# EAGLE board iceberg20 (EAGLE 9.5.0)

Size 160 x 100 mm. Coordinates in mm from the lower left corner, seen from the top.
Outline: 0,0 160,0 160,100 0,100 0,0
Copper layers (1*16): Top 0.035mm / dielectric 1.5mm / Bottom 0.035mm
Design rules "default": minimum track width 6mil, minimum drill 0.35mm, track to track 6mil, track to pad 6mil, pad to pad 6mil, via to via 6mil, smd to smd 6mil, copper to edge 40mil, drill to drill 6mil, minimum pad ring 10mil, minimum via ring 8mil, stop-mask expansion 4mil, vias tented up to drill 0mil, thermal gap 10mil
Net classes: 1 signal: width 0.254 mm; 3 4A: width 1.016 mm; 4 6A: width 2.032 mm

## Footprints (pad centres in the part's own frame; a part is rotated, then mirrored left to right if it is on the bottom)
C0805 = smd 1.172 x 1.565: 1 -1.072,0; 2 1.072,0
DPAK = smd 2.702 x 1.023: 1 -4.253,1.14; 2 -4.253,-1.14 | smd 6.083 x 5.529: 3 2.562,0
CAPACITOR-THT-4 = drill 0.6: 1 -0.75,0; 2 0.75,0
CON-01X02 = drill 1.016 pad 1.88: 1 1.22,2.5; 2 3.76,2.5
CON-01X04 = drill 1.1: 1 1.22,3.17; 2 3.76,3.17; 3 6.3,3.17; 4 8.84,3.17
SO8 = smd 0.6 x 2.2: 1 -1.905,-2.6; 2 -0.635,-2.6; 3 0.635,-2.6; 4 1.905,-2.6; 5 1.905,2.6; 6 0.635,2.6; 7 -0.635,2.6; 8 -1.905,2.6
R0805 = smd 1.3 x 1.5: 1 -0.95,0; 2 0.95,0
2X5 = drill 0.8 square: 1 -3,3 | drill 0.8: 2 0,3; 3 -3,0; 4 0,0; 5 -3,-3; 6 0,-3; 7 -3,-6; 8 0,-6; 9 -3,-9; 10 0,-9
2X15 = drill 0.7 square: 1 -1.27,17.78 | drill 0.7: 2 1.27,17.78; 3 -1.27,15.24; 4 1.27,15.24; 5 -1.27,12.7; 6 1.27,12.7; 7 -1.27,10.16; 8 1.27,10.16; 9 -1.27,7.62; 10 1.27,7.62; 11 -1.27,5.08; 12 1.27,5.08; 13 -1.27,2.54; 14 1.27,2.54; 15 -1.27,0; 16 1.27,0; 17 -1.27,-2.54; 18 1.27,-2.54; 19 -1.27,-5.08; 20 1.27,-5.08; 21 -1.27,-7.62; 22 1.27,-7.62; 23 -1.27,-10.16; 24 1.27,-10.16; 25 -1.27,-12.7; 26 1.27,-12.7; 27 -1.27,-15.24; 28 1.27,-15.24; 29 -1.27,-17.78; 30 1.27,-17.78
ARDUINO_MEGA = drill 1.016 pad 1.88: 0 11.43,25.4; 1 8.89,25.4; 2 6.35,25.4; 3 3.81,25.4; 3.3V -16.51,-22.86; 4 1.27,25.4; 5 -1.27,25.4; 5V@0 -13.97,-22.86; 5V@1 41.91,25.4; 5V@2 44.45,25.4; 6 -3.81,25.4; 7 -6.35,25.4; 8 -10.414,25.4; 9 -12.954,25.4; 10 -15.494,25.4; 11 -18.034,25.4; 12 -20.574,25.4; 13 -23.114,25.4; 14 16.51,25.4; 15 19.05,25.4; 16 21.59,25.4; 17 24.13,25.4; 18 26.67,25.4; 19 29.21,25.4; 20 31.75,25.4; 21 34.29,25.4; A0 -1.27,-22.86; A1 1.27,-22.86; A2 3.81,-22.86; A3 6.35,-22.86; A4 8.89,-22.86; A5 11.43,-22.86; A6 13.97,-22.86; A7 16.51,-22.86; A8 21.59,-22.86; A9 24.13,-22.86; A10 26.67,-22.86; A11 29.21,-22.86; A12 31.75,-22.86; A13 34.29,-22.86; A14 36.83,-22.86; A15 39.37,-22.86; AREF -28.194,25.4; GND@0 -11.43,-22.86; GND@1 -8.89,-22.86; GND@2 41.91,-17.78; GND@3 44.45,-17.78; GND@4 -25.654,25.4; RESET -19.05,-22.86; VIN -6.35,-22.86 | drill 1.016 pad 1.88 octagon: 22 41.91,22.86; 23 44.45,22.86; 24 41.91,20.32; 25 44.45,20.32; 26 41.91,17.78; 27 44.45,17.78; 28 41.91,15.24; 29 44.45,15.24; 30 41.91,12.7; 31 44.45,12.7; 32 41.91,10.16; 33 44.45,10.16; 34 41.91,7.62; 35 44.45,7.62; 36 41.91,5.08; 37 44.45,5.08; 38 41.91,2.54; 39 44.45,2.54; 40 41.91,0; 41 44.45,0; 42 41.91,-2.54; 43 44.45,-2.54; 44 41.91,-5.08; 45 44.45,-5.08; 46 41.91,-7.62; 47 44.45,-7.62; 48 41.91,-10.16; 49 44.45,-10.16; 50 41.91,-12.7; 51 44.45,-12.7; 52 41.91,-15.24; 53 44.45,-15.24
TESTPAD_B2,54 = smd 2.54 x 2.54: TP 0,0
HC-05 = drill 1.2 square: 1 -6.35,-8.89 | drill 1.2: 2 -3.81,-8.89; 3 -1.27,-8.89; 4 1.27,-8.89; 5 3.81,-8.89; 6 6.35,-8.89
JUMPER-SJ-3 = smd 1.168 x 1.6: 1 -1.524,0; 2 0,0; 3 1.524,0
2X3 = drill 1 pad 1.88 square: 1 -1.27,2.54 | drill 1 pad 1.88: 2 1.27,2.54; 3 -1.27,0; 4 1.27,0; 5 -1.27,-2.54; 6 1.27,-2.54
PLCC-2 = smd 1.4 x 1.4: A -1.45,0; C 1.45,0
SPEAKER = drill 0.8 square: 1 0,0 | drill 0.8: 2 6.5,0
1801.2106 = drill 1.4 long: 1 0,-0.076; 2 0,7.5
TEENSY-3 = drill 1.1: 0 7.62,-13.97; 1 7.62,-11.43; 2 7.62,-8.89; 3 7.62,-6.35; 3.3V 2.54,16.51; 3V -7.62,-11.43; 4 7.62,-3.81; 5 7.62,-1.27; 6 7.62,1.27; 7 7.62,3.81; 8 7.62,6.35; 9 7.62,8.89; 10 7.62,11.43; 11 7.62,13.97; 12 7.62,16.51; 13 -7.62,16.51; 14 -7.62,13.97; 15 -7.62,11.43; 16 -7.62,8.89; 17 -7.62,6.35; 18 -7.62,3.81; 19 -7.62,1.27; 20 -7.62,-1.27; 21 -7.62,-3.81; 22 -7.62,-6.35; 23 -7.62,-8.89; A10 -5.08,-6.35; A11 -5.08,-3.81; A14/DAC -5.08,16.51; AGND -7.62,-13.97; AREF -5.08,-8.89; GND 0,16.51; GND1 7.62,-16.51; PROG -2.54,16.51; VBAT 5.08,16.51; VIN -7.62,-16.51; VUSB -5.08,-13.97
SH22,5 = drill 1.321 pad 2.54 long: 1 -11.252,0; 2 11.252,0
1206 = smd 1.4 x 1.5: A -1.5,0; C 1.5,0
TSOP312 = drill 1 square: 1 -3.81,0 | drill 1: 2 -1.27,0; 3 3.81,0
USOP-8 = smd 1.725 x 0.507: 1 -2.215,0.975; 2 -2.215,0.325; 3 -2.215,-0.325; 4 -2.215,-0.975; 5 2.215,-0.975; 6 2.215,-0.325; 7 2.215,0.325; 8 2.215,0.975
LED-3MM = drill 0.84 pad 1.44 square: 1 -1.27,0 | drill 0.84 pad 1.44: 2 1.27,0
SOT23 = smd 1.38 x 0.679: 1 -1.216,-0.95; 2 -1.216,0.95; 3 1.216,0
CAPACITOR-THT-13 = drill 0.85 pad 1.55: 1 -2.54,0; 2 2.54,0
DO-214BA = smd 2.716 x 1.709: 1 -2.316,0; 2 2.316,0
TO220V = drill 1.016 long: 1 -2.54,-2.54; 2 0,-2.54; 3 2.54,-2.54
CAPACITOR-THT-6.3 = drill 0.75 pad 1.45: 1 -1.25,0; 2 1.25,0
DIL20 = drill 0.813 long: 1 -11.43,-3.81; 2 -8.89,-3.81; 3 -6.35,-3.81; 4 -3.81,-3.81; 5 -1.27,-3.81; 6 1.27,-3.81; 7 3.81,-3.81; 8 6.35,-3.81; 9 8.89,-3.81; 10 11.43,-3.81; 11 11.43,3.81; 12 8.89,3.81; 13 6.35,3.81; 14 3.81,3.81; 15 1.27,3.81; 16 -1.27,3.81; 17 -3.81,3.81; 18 -6.35,3.81; 19 -8.89,3.81; 20 -11.43,3.81
SOIC-8 = smd 1.212 x 0.599: 1 -2.8,1.905; 2 -2.8,0.635; 3 -2.8,-0.635; 4 -2.8,-1.905; 5 2.8,-1.905; 6 2.8,-0.635; 7 2.8,0.635; 8 2.8,1.905
TO252 = smd 2.914 x 1.004: 1 -4.346,2.29; 2 -4.346,-2.29 | smd 6.457 x 4.782: 3 2.574,0
LIB_WECO121 = drill 1.4: P1 5.08,0 | drill 1.4 square: P2 0,0
XH-4 = drill 1 square: P$1 -3.75,0 | drill 1: P$2 -1.25,0; P$3 1.25,0; P$4 3.75,0
TO-92 = drill 0.813 octagon: 1 1.27,0; 2 0,1.905; 3 -1.27,0
CMPS12 = drill 1.2 square: 1 -6.35,-10.16 | drill 1.2: 2 -3.81,-10.16; 3 -1.27,-10.16; 4 1.27,-10.16; 5 3.81,-10.16; 6 6.35,-10.16
RTC = drill 1.1: + 5.08,0; - -5.08,0; C 0,0; D 2.54,0; NC -2.54,0
SRF-08 = drill 1 square: 1 -5.08,-2.54 | drill 1: 2 -2.54,-2.54; 3 0,-2.54; 4 2.54,-2.54; 5 5.08,-2.54
SJ = smd 1.168 x 1.6: 1 -0.762,0; 2 0.762,0

## Placement (x,y rotation side)
5V-LINEARWANDLER1:C1  100n  [C0805]  not placed on the board
5V-LINEARWANDLER1:C2  330n  [C0805]  not placed on the board
5V-LINEARWANDLER1:IC1  L7805CV  [DPAK]  not placed on the board
5V-LINEARWANDLER2:C1  100n  [C0805]  not placed on the board
5V-LINEARWANDLER2:C2  330n  [C0805]  not placed on the board
5V-LINEARWANDLER2:IC1  L7805CV  [DPAK]  not placed on the board
5V-LINEARWANDLER4:C1  100n  [C0805]  not placed on the board
5V-LINEARWANDLER4:C2  330n  [C0805]  not placed on the board
5V-LINEARWANDLER4:IC1  L7805CV  [DPAK]  not placed on the board
ANSCHLUESSE1:C1  100n  [C0805]  not placed on the board
ANSCHLUESSE1:C2  1 uF, 50 V, ±20 %  [CAPACITOR-THT-4]  not placed on the board
ANSCHLUESSE1:X1  PS25/2GPS25/2GWS-1X02  [CON-01X02]  not placed on the board
ANSCHLUESSE1:X2  PS25/2GPS25/2GWS-1X02  [CON-01X02]  not placed on the board
ANSCHLUESSE1:X3  PS25/2GPS25/2GWS-1X02  [CON-01X02]  not placed on the board
ANSCHLUESSE1:X4  PS25/2GPS25/2GWS-1X02  [CON-01X02]  not placed on the board
ANSCHLUESSE1:X5  PS25/4G  [CON-01X04]  not placed on the board
ANSCHLUESSE-UNTEN1:IC1  P82B96  [SO8]  not placed on the board
ANSCHLUESSE-UNTEN1:R1  10k  [R0805]  not placed on the board
ANSCHLUESSE-UNTEN1:R2  10k  [R0805]  not placed on the board
ANSCHLUESSE-UNTEN1:X1  BUCHSENLEISTE-10  [2X5]  not placed on the board
ANSCHLUESSE-UNTEN1:X2  WANNENSTECKER-30  [2X15]  not placed on the board
ARDUINO1:IC1  ARUINO-MEGA  [ARDUINO_MEGA]  not placed on the board
ARDUINO1:R1  1k  [R0805]  not placed on the board
ARDUINO1:R2  1k  [R0805]  not placed on the board
ARDUINO1:R3  100k  [R0805]  not placed on the board
ARDUINO1:R4  100k  [R0805]  not placed on the board
ARDUINO1:TP1  TESTPAD  [TESTPAD_B2,54]  not placed on the board
ARDUINO1:TP2  TESTPAD  [TESTPAD_B2,54]  not placed on the board
BLUETOOTH1:C1  100n  [C0805]  not placed on the board
BLUETOOTH1:IC1  HC-05  [HC-05]  not placed on the board
CAMERA1:C1  1 uF, 50 V, ±20 %  [CAPACITOR-THT-4]  not placed on the board
CAMERA1:J1  JUMPER  [JUMPER-SJ-3]  not placed on the board
CAMERA1:X1  WANNENSTECKER-6  [2X3]  not placed on the board
CAMERA1:X2  WANNENSTECKER-6  [2X3]  not placed on the board
CAMERA1:X3  PS25/2GPS25/2GWS-1X02  [CON-01X02]  not placed on the board
EIN/AUSGABE1:LED1  GREEN  [PLCC-2]  not placed on the board
EIN/AUSGABE1:LED2  GREEN  [PLCC-2]  not placed on the board
EIN/AUSGABE1:LED3  LED-WHITE  [PLCC-2]  not placed on the board
EIN/AUSGABE1:LED4  LED-WHITE  [PLCC-2]  not placed on the board
EIN/AUSGABE1:LED5  LED-WHITE  [PLCC-2]  not placed on the board
EIN/AUSGABE1:M1  SPEAKER  [SPEAKER]  not placed on the board
EIN/AUSGABE1:R1  100R  [R0805]  not placed on the board
EIN/AUSGABE1:R2  100R  [R0805]  not placed on the board
EIN/AUSGABE1:R3  120R  [R0805]  not placed on the board
EIN/AUSGABE1:R4  120R  [R0805]  not placed on the board
EIN/AUSGABE1:R5  120R  [R0805]  not placed on the board
EIN/AUSGABE1:S1  SWITCH  [1801.2106]  not placed on the board
ENC1:IC1  TEENSY-3.2  [TEENSY-3]  not placed on the board
ENC1:LED1  LED-WHITE  [PLCC-2]  not placed on the board
ENC1:LED2  LED-WHITE  [PLCC-2]  not placed on the board
ENC1:LED3  LED-WHITE  [PLCC-2]  not placed on the board
ENC1:LED4  LED-WHITE  [PLCC-2]  not placed on the board
ENC1:R1  120R  [R0805]  not placed on the board
ENC1:R2  120R  [R0805]  not placed on the board
ENC1:R3  120R  [R0805]  not placed on the board
ENC1:R4  120R  [R0805]  not placed on the board
F1:F1  [SH22,5]  not placed on the board
F1:LED1  LED-GREEN1  [1206]  not placed on the board
F1:LED2  LED-GREEN1  [1206]  not placed on the board
F1:R1  270R  [R0805]  not placed on the board
F2:F1  [SH22,5]  not placed on the board
F2:LED1  LED-GREEN1  [1206]  not placed on the board
F2:LED2  LED-GREEN1  [1206]  not placed on the board
F2:R1  270R  [R0805]  not placed on the board
F3:F1  [SH22,5]  not placed on the board
F3:LED1  LED-GREEN1  [1206]  not placed on the board
F3:LED2  LED-GREEN1  [1206]  not placed on the board
F3:R1  270R  [R0805]  not placed on the board
F4:F1  [SH22,5]  not placed on the board
F4:LED1  LED-GREEN1  [1206]  not placed on the board
F4:LED2  LED-GREEN1  [1206]  not placed on the board
F4:R1  270R  [R0805]  not placed on the board
F5:F1  [SH22,5]  not placed on the board
F5:LED1  LED-GREEN1  [1206]  not placed on the board
F5:LED2  LED-GREEN1  [1206]  not placed on the board
F5:R1  270R  [R0805]  not placed on the board
F6:F1  [SH22,5]  not placed on the board
F6:LED1  LED-GREEN1  [1206]  not placed on the board
F6:LED2  LED-GREEN1  [1206]  not placed on the board
F6:R1  270R  [R0805]  not placed on the board
IR-EMPFAENGER1:C1  100n  [C0805]  not placed on the board
IR-EMPFAENGER1:C2  100n  [C0805]  not placed on the board
IR-EMPFAENGER1:C3  100n  [C0805]  not placed on the board
IR-EMPFAENGER1:C4  100n  [C0805]  not placed on the board
IR-EMPFAENGER1:C5  100n  [C0805]  not placed on the board
IR-EMPFAENGER1:C6  100n  [C0805]  not placed on the board
IR-EMPFAENGER1:IC1  TSOP31433  [TSOP312]  not placed on the board
IR-EMPFAENGER1:IC2  TSOP31433  [TSOP312]  not placed on the board
IR-EMPFAENGER1:IC3  TSOP31433  [TSOP312]  not placed on the board
IR-EMPFAENGER1:IC4  TSOP31433  [TSOP312]  not placed on the board
IR-EMPFAENGER1:IC5  TSOP31433  [TSOP312]  not placed on the board
IR-EMPFAENGER1:IC6  TSOP31433  [TSOP312]  not placed on the board
IR_SENDER1:C1  100n  [C0805]  not placed on the board
IR_SENDER1:IC1  DS1099  [USOP-8]  not placed on the board
IR_SENDER1:LED1  IR-LED  [LED-3MM]  not placed on the board
IR_SENDER1:LED2  IR-LED  [LED-3MM]  not placed on the board
IR_SENDER1:LED3  IR-LED  [LED-3MM]  not placed on the board
IR_SENDER1:LED4  IR-LED  [LED-3MM]  not placed on the board
IR_SENDER1:LED5  IR-LED  [LED-3MM]  not placed on the board
IR_SENDER1:LED6  IR-LED  [LED-3MM]  not placed on the board
IR_SENDER1:LED7  IR-LED  [LED-3MM]  not placed on the board
IR_SENDER1:LED8  IR-LED  [LED-3MM]  not placed on the board
IR_SENDER1:LED9  IR-LED  [LED-3MM]  not placed on the board
IR_SENDER1:LED10  IR-LED  [LED-3MM]  not placed on the board
IR_SENDER1:LED11  IR-LED  [LED-3MM]  not placed on the board
IR_SENDER1:LED12  IR-LED  [LED-3MM]  not placed on the board
IR_SENDER1:LED13  IR-LED  [LED-3MM]  not placed on the board
IR_SENDER1:LED14  IR-LED  [LED-3MM]  not placed on the board
IR_SENDER1:R1  100k  [R0805]  not placed on the board
IR_SENDER1:R2  100k  [R0805]  not placed on the board
IR_SENDER1:R3  100R  [R0805]  not placed on the board
IR_SENDER1:R4  100k  [R0805]  not placed on the board
IR_SENDER1:R5  100R  [R0805]  not placed on the board
IR_SENDER1:R6  100k  [R0805]  not placed on the board
IR_SENDER1:R7  15R  [R0805]  not placed on the board
IR_SENDER1:R8  15R  [R0805]  not placed on the board
IR_SENDER1:T1  KMA3D6N20SA  [SOT23]  not placed on the board
IR_SENDER1:T2  KMA3D6N20SA  [SOT23]  not placed on the board
K1:C1  2,2 mF, 16 V, ±20 %  [CAPACITOR-THT-13]  not placed on the board
K1:D1  DIODE  [DO-214BA]  not placed on the board
K1:R1  300R  [R0805]  not placed on the board
K1:R2  100k  [R0805]  not placed on the board
K1:T1  IRF1405  [TO220V]  not placed on the board
M0:+  TESTPAD  [TESTPAD_B2,54]  not placed on the board
M0:-  TESTPAD  [TESTPAD_B2,54]  not placed on the board
M0:C1  10nF  [C0805]  not placed on the board
M0:C2  220nF  [C0805]  not placed on the board
M0:C3  100nF  [C0805]  not placed on the board
M0:C4  100uF, 16V, ±20 %  [CAPACITOR-THT-6.3]  not placed on the board
M0:C5  1nF  [C0805]  not placed on the board
M0:C6  100nF  [C0805]  not placed on the board
M0:D1  DIODE  [DO-214BA]  not placed on the board
M0:D2  DIODE  [DO-214BA]  not placed on the board
M0:EN  TESTPAD  [TESTPAD_B2,54]  not placed on the board
M0:I  TESTPAD  [TESTPAD_B2,54]  not placed on the board
M0:IC1  L6205N  [DIL20]  not placed on the board
M0:IC2  ACS712ACS712-SOIC-8  [SOIC-8]  not placed on the board
M0:IN1  TESTPAD  [TESTPAD_B2,54]  not placed on the board
M0:IN2  TESTPAD  [TESTPAD_B2,54]  not placed on the board
M0:R1  100R  [R0805]  not placed on the board
M0:R2  100k  [R0805]  not placed on the board
M0:R3  10k  [R0805]  not placed on the board
M0:VS  TESTPAD  [TESTPAD_B2,54]  not placed on the board
M1:+  TESTPAD  [TESTPAD_B2,54]  not placed on the board
M1:-  TESTPAD  [TESTPAD_B2,54]  not placed on the board
M1:C1  10nF  [C0805]  not placed on the board
M1:C2  220nF  [C0805]  not placed on the board
M1:C3  100nF  [C0805]  not placed on the board
M1:C4  100uF, 16V, ±20 %  [CAPACITOR-THT-6.3]  not placed on the board
M1:C5  1nF  [C0805]  not placed on the board
M1:C6  100nF  [C0805]  not placed on the board
M1:D1  DIODE  [DO-214BA]  not placed on the board
M1:D2  DIODE  [DO-214BA]  not placed on the board
M1:EN  TESTPAD  [TESTPAD_B2,54]  not placed on the board
M1:I  TESTPAD  [TESTPAD_B2,54]  not placed on the board
M1:IC1  L6205N  [DIL20]  not placed on the board
M1:IC2  ACS712ACS712-SOIC-8  [SOIC-8]  not placed on the board
M1:IN1  TESTPAD  [TESTPAD_B2,54]  not placed on the board
M1:IN2  TESTPAD  [TESTPAD_B2,54]  not placed on the board
M1:R1  100R  [R0805]  not placed on the board
M1:R2  100k  [R0805]  not placed on the board
M1:R3  10k  [R0805]  not placed on the board
M1:VS  TESTPAD  [TESTPAD_B2,54]  not placed on the board
M2:+  TESTPAD  [TESTPAD_B2,54]  not placed on the board
M2:-  TESTPAD  [TESTPAD_B2,54]  not placed on the board
M2:C1  10nF  [C0805]  not placed on the board
M2:C2  220nF  [C0805]  not placed on the board
M2:C3  100nF  [C0805]  not placed on the board
M2:C4  100uF, 16V, ±20 %  [CAPACITOR-THT-6.3]  not placed on the board
M2:C5  1nF  [C0805]  not placed on the board
M2:C6  100nF  [C0805]  not placed on the board
M2:D1  DIODE  [DO-214BA]  not placed on the board
M2:D2  DIODE  [DO-214BA]  not placed on the board
M2:EN  TESTPAD  [TESTPAD_B2,54]  not placed on the board
M2:I  TESTPAD  [TESTPAD_B2,54]  not placed on the board
M2:IC1  L6205N  [DIL20]  not placed on the board
M2:IC2  ACS712ACS712-SOIC-8  [SOIC-8]  not placed on the board
M2:IN1  TESTPAD  [TESTPAD_B2,54]  not placed on the board
M2:IN2  TESTPAD  [TESTPAD_B2,54]  not placed on the board
M2:R1  100R  [R0805]  not placed on the board
M2:R2  100k  [R0805]  not placed on the board
M2:R3  10k  [R0805]  not placed on the board
M2:VS  TESTPAD  [TESTPAD_B2,54]  not placed on the board
M3:+  TESTPAD  [TESTPAD_B2,54]  not placed on the board
M3:-  TESTPAD  [TESTPAD_B2,54]  not placed on the board
M3:C1  10nF  [C0805]  not placed on the board
M3:C2  220nF  [C0805]  not placed on the board
M3:C3  100nF  [C0805]  not placed on the board
M3:C4  100uF, 16V, ±20 %  [CAPACITOR-THT-6.3]  not placed on the board
M3:C5  1nF  [C0805]  not placed on the board
M3:C6  100nF  [C0805]  not placed on the board
M3:D1  DIODE  [DO-214BA]  not placed on the board
M3:D2  DIODE  [DO-214BA]  not placed on the board
M3:EN  TESTPAD  [TESTPAD_B2,54]  not placed on the board
M3:I  TESTPAD  [TESTPAD_B2,54]  not placed on the board
M3:IC1  L6205N  [DIL20]  not placed on the board
M3:IC2  ACS712ACS712-SOIC-8  [SOIC-8]  not placed on the board
M3:IN1  TESTPAD  [TESTPAD_B2,54]  not placed on the board
M3:IN2  TESTPAD  [TESTPAD_B2,54]  not placed on the board
M3:R1  100R  [R0805]  not placed on the board
M3:R2  100k  [R0805]  not placed on the board
M3:R3  10k  [R0805]  not placed on the board
M3:VS  TESTPAD  [TESTPAD_B2,54]  not placed on the board
P1:R1  100k  [R0805]  not placed on the board
P1:S1  SWITCH  [1801.2106]  not placed on the board
P1:T1  AOD403  [TO252]  not placed on the board
P1:X1  TERMINAL-2  [LIB_WECO121]  not placed on the board
PUI1:X3  JST-XH-4  [XH-4]  not placed on the board
PUI1:X4  WANNENSTECKER-6  [2X3]  not placed on the board
SENSOREN1:C1  100n  [C0805]  not placed on the board
SENSOREN1:C2  100n  [C0805]  not placed on the board
SENSOREN1:C3  100n  [C0805]  not placed on the board
SENSOREN1:C4  100n  [C0805]  not placed on the board
SENSOREN1:C5  100n  [C0805]  not placed on the board
SENSOREN1:C6  100n  [C0805]  not placed on the board
SENSOREN1:C7  100n  [C0805]  not placed on the board
SENSOREN1:C8  100n  [C0805]  not placed on the board
SENSOREN1:IC1  LM-35  [TO-92]  not placed on the board
SENSOREN1:IC2  CMPS12  [CMPS12]  not placed on the board
SENSOREN1:IC3  RTC  [RTC]  not placed on the board
SENSOREN1:IC4  SRF-08  [SRF-08]  not placed on the board
SENSOREN1:IC5  SRF-08  [SRF-08]  not placed on the board
SENSOREN1:IC6  SRF-08  [SRF-08]  not placed on the board
SENSOREN1:IC7  SRF-08  [SRF-08]  not placed on the board
SENSOREN1:IC8  SRF-08  [SRF-08]  not placed on the board
SENSOREN1:J1  JUMPER-2  [SJ]  not placed on the board
SENSOREN1:R1  20k  [R0805]  not placed on the board
SENSOREN1:R2  470  [R0805]  not placed on the board
SENSOREN1:T1  SFH320  [PLCC-2]  not placed on the board
SENSOREN1:X1  PS25/2GPS25/2GWS-1X02  [CON-01X02]  not placed on the board
SENSOREN1:X2  PS25/2GPS25/2GWS-1X02  [CON-01X02]  not placed on the board

## Library data of the parts
5V-LINEARWANDLER1:C1 5V-LINEARWANDLER1:C2 5V-LINEARWANDLER2:C1 5V-LINEARWANDLER2:C2 5V-LINEARWANDLER4:C1 5V-LINEARWANDLER4:C2 ANSCHLUESSE1:C1 BLUETOOTH1:C1 IR-EMPFAENGER1:C1-IR-EMPFAENGER1:C6 IR_SENDER1:C1 M0:C1-M0:C3 M0:C5 M0:C6 M1:C1-M1:C3 M1:C5 M1:C6 M2:C1-M2:C3 M2:C5 M2:C6 M3:C1-M3:C3 M3:C5 M3:C6 SENSOREN1:C1-SENSOREN1:C8 = iceberg20; BESTAND: -; HERSTELLER: -; HERSTELLER-NR: -; SUPPLIER: -; SUPPLIER-NR: -; TOLERANZ: 10%; V-MAX: 20V
5V-LINEARWANDLER1:IC1 5V-LINEARWANDLER2:IC1 5V-LINEARWANDLER4:IC1 = iceberg20; BESTAND: 4
ANSCHLUESSE1:C2 CAMERA1:C1 = iceberg20; BESTAND: 10
ANSCHLUESSE1:X1-ANSCHLUESSE1:X4 CAMERA1:X3 SENSOREN1:X1 SENSOREN1:X2 = iceberg20; SUPPLIER: Reichelt; SUPPLIER-NR: PS 25/2G WS
ANSCHLUESSE1:X5 = iceberg20; BESTAND: 0; HERSTELLER: TE-Connectivity; HERSTELLER-NR: 3-641126-4; SUPPLIER: Mouser; SUPPLIER-NR: 571-3-641126-4
ANSCHLUESSE-UNTEN1:IC1 = iceberg20; BESTAND: 0; HERSTELLER: NXP; HERSTELLER-NR: P82B96TD,112; SUPPLIER: reichelt; SUPPLIER-NR: P 82B96 TD
ANSCHLUESSE-UNTEN1:R1 ANSCHLUESSE-UNTEN1:R2 ARDUINO1:R1-ARDUINO1:R4 EIN/AUSGABE1:R1-EIN/AUSGABE1:R5 ENC1:R1-ENC1:R4 F1:R1 F2:R1 F3:R1 F4:R1 F5:R1 F6:R1 IR_SENDER1:R1-IR_SENDER1:R8 K1:R1 K1:R2 M0:R1-M0:R3 M1:R1-M1:R3 M2:R1-M2:R3 M3:R1-M3:R3 P1:R1 SENSOREN1:R1 SENSOREN1:R2 = iceberg20; BESTAND: -; HERSTELLER: -; HERSTELLER-NR: -; SUPPLIER: -; SUPPLIER-NR: -; TOLERANZ: 5%
ANSCHLUESSE-UNTEN1:X1 = iceberg20; BESTAND: 0; HERSTELLER: Molex; HERSTELLER-NR: 43045-1012; SUPPLIER: Mouser; SUPPLIER-NR: 538-43045-1012
ANSCHLUESSE-UNTEN1:X2 = iceberg20; BESTAND: 0; HERSTELLER: HARTING; HERSTELLER-NR: 09 18 530 6324; SUPPLIER: reichelt; SUPPLIER-NR: HAN 530 6324
ARDUINO1:IC1 = iceberg20; BESTAND: 4; HERSTELLER: Arduino; HERSTELLER-NR: Arduino Mega 2560; SUPPLIER: Makerstore; SUPPLIER-NR: Arduino Mega 2650
ARDUINO1:TP1 ARDUINO1:TP2 M0:+ M0:- M0:EN M0:I M0:IN1 M0:IN2 M0:VS M1:+ M1:- M1:EN M1:I M1:IN1 M1:IN2 M1:VS M2:+ M2:- M2:EN M2:I M2:IN1 M2:IN2 M2:VS M3:+ M3:- M3:EN M3:I M3:IN1 M3:IN2 M3:VS = iceberg20; BESTAND: -; HERSTELLER: -; HERSTELLER-NR: -; SUPPLIER: -; SUPPLIER-NR: -
BLUETOOTH1:IC1 = iceberg20; BESTAND: ?
CAMERA1:J1 = iceberg20
CAMERA1:X1 CAMERA1:X2 PUI1:X4 = iceberg20; BESTAND: 6; HERSTELLER: Harting; HERSTELLER-NR: 09185066324; SUPPLIER: Bürklin; SUPPLIER-NR: 53F4200
EIN/AUSGABE1:LED1 EIN/AUSGABE1:LED2 = iceberg20; BESTAND: ?; HERSTELLER: Osram Opto Semi; HERSTELLER-NR: LPT675-N1P2-25-Z; SUPPLIER: Bürklin; SUPPLIER-NR: 66S9720
EIN/AUSGABE1:LED3-EIN/AUSGABE1:LED5 ENC1:LED1-ENC1:LED4 = iceberg20; BESTAND: 15; HERSTELLER: Osram Opto Semi; HERSTELLER-NR: LWT67C-T2U2-5K8L-Z; SUPPLIER: Bürklin; SUPPLIER-NR: 66S9826
EIN/AUSGABE1:M1 = iceberg20; BESTAND: ?; HERSTELLER: Digisound; HERSTELLER-NR: F/SWX06; SUPPLIER: Bürklin; SUPPLIER-NR: 38M212
EIN/AUSGABE1:S1 P1:S1 = iceberg20; BESTAND: 1; HERSTELLER: Marquardt; HERSTELLER-NR: 1801.2106; SUPPLIER: Bürklin; SUPPLIER-NR: 11G2420
ENC1:IC1 = iceberg20; BESTAND: 0; HERSTELLER: PJRC; HERSTELLER-NR: Teensy32; SUPPLIER: Reichelt; SUPPLIER-NR: TEENSY 3.2
F1:F1 F2:F1 F3:F1 F4:F1 F5:F1 F6:F1 = iceberg20; BESTAND: ?; HERSTELLER: SCHURTER; HERSTELLER-NR: 0031.8201; SUPPLIER: Bürklin; SUPPLIER-NR: 46G6020
F1:LED1 F1:LED2 F2:LED1 F2:LED2 F3:LED1 F3:LED2 F4:LED1 F4:LED2 F5:LED1 F5:LED2 F6:LED1 F6:LED2 = iceberg20; HERSTELLER: EVERLIGHT; HERSTELLER-NR: 15-21SYGC/S530-E1/TR8 Everlight; SUPPLIER: Bürklin; SUPPLIER-NR: 67S2004
IR-EMPFAENGER1:IC1-IR-EMPFAENGER1:IC6 = iceberg20; BESTAND: ?; HERSTELLER: Vishay Semiconductors; HERSTELLER-NR: TSOP31433; SUPPLIER: Mouser; SUPPLIER-NR: 78-TSOP31433
IR_SENDER1:IC1 = iceberg20; BESTAND: 0; HERSTELLER: Maxim Integrated; HERSTELLER-NR: DS1099U-FF+; SUPPLIER: Mouser; SUPPLIER-NR: 700-DS1099U-FF
IR_SENDER1:LED1-IR_SENDER1:LED14 = iceberg20; BESTAND: ?; HERSTELLER: Vishay; HERSTELLER-NR: TSAL4400; SUPPLIER: Bürklin; SUPPLIER-NR: 68S9224
IR_SENDER1:T1 IR_SENDER1:T2 = iceberg20; BESTAND: 0; HERSTELLER: Korea Electronics; HERSTELLER-NR: KMA3D6N20SA-RTK/P; SUPPLIER: Bürklin; SUPPLIER-NR: 24S8084
K1:C1 = iceberg20; BESTAND: ?; HERSTELLER: Teapo; HERSTELLER-NR: KSY228M016S1A5L25K SY2200UF/16V; SUPPLIER: Bürklin; SUPPLIER-NR: 11D5156
K1:D1 M0:D1 M0:D2 M1:D1 M1:D2 M2:D1 M2:D2 M3:D1 M3:D2 = iceberg20; BESTAND: 0; HERSTELLER: Vishay; HERSTELLER-NR: 9DRGF1A67A; SUPPLIER: Bürklin; SUPPLIER-NR: 26S9150
K1:T1 = iceberg20; BESTAND: 3; HERSTELLER: IOR; HERSTELLER-NR: IRF1405PBF; SUPPLIER: Bürklin; SUPPLIER-NR: 31S3068
M0:C4 M1:C4 M2:C4 M3:C4 = iceberg20; BESTAND: 10; HERSTELLER: Teapo; HERSTELLER-NR: KSE107M016S1ABE11K; SUPPLIER: Bürklin; SUPPLIER-NR: 11D5002
M0:IC1 M1:IC1 M2:IC1 M3:IC1 = iceberg20; BESTAND: ?; HERSTELLER: ST MICROELECTRONICS; HERSTELLER-NR: L6205N; SUPPLIER: reichelt; SUPPLIER-NR: L 6205 N
M0:IC2 M1:IC2 M2:IC2 M3:IC2 = iceberg20; BESTAND: ?; HERSTELLER: ALLEGRO; HERSTELLER-NR: ACS712ELCTR-05B-T; SUPPLIER: reichelt; SUPPLIER-NR: ACS712 ELCTR-05
P1:T1 = iceberg20; BESTAND: 0; HERSTELLER: Alpha & Omega; HERSTELLER-NR: AOD403; SUPPLIER: Reichelt; SUPPLIER-NR: AO D403
P1:X1 = iceberg20; HERSTELLER: Weco; HERSTELLER-NR: 20806102 121-M-121/02-K; SUPPLIER: Bürklin; SUPPLIER-NR: 47F1100
PUI1:X3 = iceberg20; BESTAND: 0; HERSTELLER: JST; HERSTELLER-NR: B4B-XH-A (LF)(SN); SUPPLIER: Bürklin; SUPPLIER-NR: 71F6408
SENSOREN1:IC1 = iceberg20; BESTAND: ?; HERSTELLER: MikroElektronika ODER TI; HERSTELLER-NR: MIKROE-912 ODER LM35*Z/*; SUPPLIER: Bürklin; SUPPLIER-NR: 74S4560
SENSOREN1:IC2 = iceberg20; BESTAND: ?; HERSTELLER: -; HERSTELLER-NR: -; SUPPLIER: -; SUPPLIER-NR: -
SENSOREN1:IC3 = iceberg20; BESTAND: 2; HERSTELLER: div.; HERSTELLER-NR: "DS3231 for PI" Modul; SUPPLIER: -; SUPPLIER-NR: -
SENSOREN1:IC4-SENSOREN1:IC8 = iceberg20; BESTAND: 12; HERSTELLER: Devantech; HERSTELLER-NR: SRF-08; SUPPLIER: -; SUPPLIER-NR: -
SENSOREN1:J1 = iceberg20; BESTAND: n.z.; HERSTELLE-NR: n.z.; HERSTELLER: n.z.; SUPPLIER: n.z.; SUPPLIER-NR: n.z.
SENSOREN1:T1 = iceberg20; BESTAND: 40; HERSTELLER: Osram Opto Semi; HESTELLER-NR: SFH320; SUPLLIER: Bürklin; SUPPLIER-NR: 68S3158

## Nets
5V-CAMERA: 5V-LINEARWANDLER2:C1.1 5V-LINEARWANDLER2:IC1.2 CAMERA1:J1.1 CAMERA1:X2.2 CAMERA1:X2.5
5V-PUI: 5V-LINEARWANDLER4:C1.1 5V-LINEARWANDLER4:IC1.2 PUI1:X3.P$1
12V-PUI: 5V-LINEARWANDLER4:C2.1 5V-LINEARWANDLER4:IC1.1 F3:F1.2 F3:R1.2 PUI1:X4.6
+5V: 5V-LINEARWANDLER1:C1.1 5V-LINEARWANDLER1:IC1.2 ANSCHLUESSE1:C1.1 ANSCHLUESSE1:X1.1 ANSCHLUESSE1:X5.4 ANSCHLUESSE-UNTEN1:X2.1 ANSCHLUESSE-UNTEN1:X2.5 ANSCHLUESSE-UNTEN1:X2.9 ANSCHLUESSE-UNTEN1:X2.13 BLUETOOTH1:C1.1 BLUETOOTH1:IC1.5 EIN/AUSGABE1:R1.2 ENC1:IC1.VIN IR-EMPFAENGER1:C1.1 IR-EMPFAENGER1:C2.1 IR-EMPFAENGER1:C3.1 IR-EMPFAENGER1:C4.1 IR-EMPFAENGER1:C5.1 IR-EMPFAENGER1:C6.1 IR-EMPFAENGER1:IC1.2 IR-EMPFAENGER1:IC2.2 IR-EMPFAENGER1:IC3.2 IR-EMPFAENGER1:IC4.2 IR-EMPFAENGER1:IC5.2 IR-EMPFAENGER1:IC6.2 IR_SENDER1:C1.1 IR_SENDER1:IC1.3 IR_SENDER1:R1.2 IR_SENDER1:R2.2 M0:C6.1 M0:IC2.8 M1:C6.1 M1:IC2.8 M2:C6.1 M2:IC2.8 M3:C6.1 M3:IC2.8 SENSOREN1:C1.1 SENSOREN1:C2.1 SENSOREN1:C3.1 SENSOREN1:C4.1 SENSOREN1:C5.1 SENSOREN1:C6.1 SENSOREN1:C7.1 SENSOREN1:C8.1 SENSOREN1:IC1.3 SENSOREN1:IC2.1 SENSOREN1:IC3.+ SENSOREN1:IC4.1 SENSOREN1:IC5.1 SENSOREN1:IC6.1 SENSOREN1:IC7.1 SENSOREN1:IC8.1 SENSOREN1:R1.2
+12V: F1:F1.1 F2:F1.1 F3:F1.1 F4:F1.1 F5:F1.1 F6:F1.1
A1: ANSCHLUESSE1:X3.1 ARDUINO1:IC1.A10
ANSCHLUESSE-UNTEN1:SCL-12V: ANSCHLUESSE-UNTEN1:IC1.5 ANSCHLUESSE-UNTEN1:IC1.6 ANSCHLUESSE-UNTEN1:R2.1 ANSCHLUESSE-UNTEN1:X2.26
ANSCHLUESSE-UNTEN1:SDA-12V: ANSCHLUESSE-UNTEN1:IC1.2 ANSCHLUESSE-UNTEN1:IC1.3 ANSCHLUESSE-UNTEN1:R1.1 ANSCHLUESSE-UNTEN1:X2.23
ANSCHLUSS-12V: ANSCHLUESSE-UNTEN1:IC1.8 ANSCHLUESSE-UNTEN1:R1.2 ANSCHLUESSE-UNTEN1:R2.2 ANSCHLUESSE-UNTEN1:X2.19 ANSCHLUESSE-UNTEN1:X2.27 ANSCHLUESSE-UNTEN1:X2.28 F4:F1.2 F4:R1.2
ARDUINO1:+5V: ARDUINO1:IC1.5V@0 ARDUINO1:IC1.5V@1 ARDUINO1:IC1.5V@2 ARDUINO1:R1.2 ARDUINO1:R2.2 ARDUINO1:R3.2 ARDUINO1:R4.2
ARDUINO1:N$1: ARDUINO1:IC1.A11 ARDUINO1:TP2.TP
ARDUINO1:N$2: ARDUINO1:IC1.24 ARDUINO1:TP1.TP
BR-I: ARDUINO1:IC1.A6 SENSOREN1:X1.2
BR-LED: ARDUINO1:IC1.A9 SENSOREN1:R2.2
CAMERA1:5V-CAMERA: CAMERA1:J1.2 CAMERA1:X1.2
CLK: ARDUINO1:IC1.52 CAMERA1:X1.3
CS: ARDUINO1:IC1.53 CAMERA1:X1.5
D1: ANSCHLUESSE1:X4.1 ARDUINO1:IC1.43
EIN/AUSGABE1:N$1: EIN/AUSGABE1:LED1.A EIN/AUSGABE1:R1.1
EIN/AUSGABE1:N$2: EIN/AUSGABE1:LED2.A EIN/AUSGABE1:R2.1
EIN/AUSGABE1:N$3: EIN/AUSGABE1:LED3.A EIN/AUSGABE1:R3.1
EIN/AUSGABE1:N$4: EIN/AUSGABE1:LED4.A EIN/AUSGABE1:R5.1
EIN/AUSGABE1:N$5: EIN/AUSGABE1:LED5.A EIN/AUSGABE1:R4.1
EN-B: ARDUINO1:IC1.22 BLUETOOTH1:IC1.6
ENA0: ANSCHLUESSE-UNTEN1:X2.2 ENC1:IC1.2
ENA1: ANSCHLUESSE-UNTEN1:X2.6 ENC1:IC1.4
ENA2: ANSCHLUESSE-UNTEN1:X2.10 ENC1:IC1.14
ENA3: ANSCHLUESSE-UNTEN1:X2.14 ENC1:IC1.16
ENB0: ANSCHLUESSE-UNTEN1:X2.3 ENC1:IC1.3
ENB1: ANSCHLUESSE-UNTEN1:X2.7 ENC1:IC1.5
ENB2: ANSCHLUESSE-UNTEN1:X2.11 ENC1:IC1.15
ENB3: ANSCHLUESSE-UNTEN1:X2.15 ENC1:IC1.17
ENC1:3.3V: ENC1:IC1.3.3V
ENC1:3V: ENC1:IC1.3V
ENC1:LED1: ENC1:IC1.20 ENC1:R1.2
ENC1:LED2: ENC1:IC1.21 ENC1:R2.2
ENC1:LED3: ENC1:IC1.22 ENC1:R3.2
ENC1:LED4: ENC1:IC1.23 ENC1:R4.2
ENC1:N$3: ENC1:LED1.A ENC1:R1.1
ENC1:N$4: ENC1:LED2.A ENC1:R2.1
ENC1:N$5: ENC1:LED3.A ENC1:R3.1
ENC1:N$8: ENC1:LED4.A ENC1:R4.1
ENC1:VBAT: ENC1:IC1.VBAT
ENC1:VUSB: ENC1:IC1.VUSB
ETC-12V: 5V-LINEARWANDLER1:C2.1 5V-LINEARWANDLER1:IC1.1 5V-LINEARWANDLER2:C2.1 5V-LINEARWANDLER2:IC1.1 ANSCHLUESSE1:C2.1 ANSCHLUESSE1:X2.1 CAMERA1:C1.1 CAMERA1:J1.3 CAMERA1:X3.2 F6:F1.2 F6:R1.2 IR_SENDER1:R7.2 IR_SENDER1:R8.2
F1:N$1: F1:LED1.A F1:R1.1
F1:N$165: F1:LED1.C F1:LED2.A
F2:N$1: F2:LED1.A F2:R1.1
F2:N$165: F2:LED1.C F2:LED2.A
F3:N$1: F3:LED1.A F3:R1.1
F3:N$165: F3:LED1.C F3:LED2.A
F4:N$1: F4:LED1.A F4:R1.1
F4:N$165: F4:LED1.C F4:LED2.A
F5:N$1: F5:LED1.A F5:R1.1
F5:N$165: F5:LED1.C F5:LED2.A
F6:N$1: F6:LED1.A F6:R1.1
F6:N$165: F6:LED1.C F6:LED2.A
GND: 5V-LINEARWANDLER1:C1.2 5V-LINEARWANDLER1:C2.2 5V-LINEARWANDLER1:IC1.3 5V-LINEARWANDLER2:C1.2 5V-LINEARWANDLER2:C2.2 5V-LINEARWANDLER2:IC1.3 5V-LINEARWANDLER4:C1.2 5V-LINEARWANDLER4:C2.2 5V-LINEARWANDLER4:IC1.3 ANSCHLUESSE1:C1.2 ANSCHLUESSE1:C2.2 ANSCHLUESSE1:X1.2 ANSCHLUESSE1:X2.2 ANSCHLUESSE1:X3.2 ANSCHLUESSE1:X4.2 ANSCHLUESSE1:X5.2 ANSCHLUESSE-UNTEN1:IC1.4 ANSCHLUESSE-UNTEN1:X2.4 ANSCHLUESSE-UNTEN1:X2.8 ANSCHLUESSE-UNTEN1:X2.12 ANSCHLUESSE-UNTEN1:X2.16 ANSCHLUESSE-UNTEN1:X2.17 ANSCHLUESSE-UNTEN1:X2.20 ANSCHLUESSE-UNTEN1:X2.22 ANSCHLUESSE-UNTEN1:X2.24 ANSCHLUESSE-UNTEN1:X2.25 ANSCHLUESSE-UNTEN1:X2.30 ARDUINO1:IC1.GND@0 ARDUINO1:IC1.GND@1 ARDUINO1:IC1.GND@2 ARDUINO1:IC1.GND@3 ARDUINO1:IC1.GND@4 BLUETOOTH1:C1.2 BLUETOOTH1:IC1.4 CAMERA1:C1.2 CAMERA1:X1.6 CAMERA1:X2.1 CAMERA1:X2.6 CAMERA1:X3.1 EIN/AUSGABE1:LED2.C EIN/AUSGABE1:LED3.C EIN/AUSGABE1:LED4.C EIN/AUSGABE1:LED5.C EIN/AUSGABE1:M1.2 EIN/AUSGABE1:S1.1 ENC1:IC1.AGND ENC1:IC1.GND ENC1:IC1.GND1 ENC1:LED1.C ENC1:LED2.C ENC1:LED3.C ENC1:LED4.C F1:LED2.C F2:LED2.C F3:LED2.C F4:LED2.C F5:LED2.C F6:LED2.C IR-EMPFAENGER1:C1.2 IR-EMPFAENGER1:C2.2 IR-EMPFAENGER1:C3.2 IR-EMPFAENGER1:C4.2 IR-EMPFAENGER1:C5.2 IR-EMPFAENGER1:C6.2 IR-EMPFAENGER1:IC1.1 IR-EMPFAENGER1:IC2.1 IR-EMPFAENGER1:IC3.1 IR-EMPFAENGER1:IC4.1 IR-EMPFAENGER1:IC5.1 IR-EMPFAENGER1:IC6.1 IR_SENDER1:C1.2 IR_SENDER1:IC1.4 IR_SENDER1:R4.1 IR_SENDER1:R6.1 IR_SENDER1:T1.1 IR_SENDER1:T2.1 K1:C1.2 K1:R2.1 K1:T1.3 M0:C3.2 M0:C4.2 M0:C5.2 M0:C6.2 M0:IC1.3 M0:IC1.5 M0:IC1.6 M0:IC1.8 M0:IC1.15 M0:IC1.16 M0:IC2.5 M0:R3.1 M1:C3.2 M1:C4.2 M1:C5.2 M1:C6.2 M1:IC1.3 M1:IC1.5 M1:IC1.6 M1:IC1.8 M1:IC1.15 M1:IC1.16 M1:IC2.5 M1:R3.1 M2:C3.2 M2:C4.2 M2:C5.2 M2:C6.2 M2:IC1.3 M2:IC1.5 M2:IC1.6 M2:IC1.8 M2:IC1.15 M2:IC1.16 M2:IC2.5 M2:R3.1 M3:C3.2 M3:C4.2 M3:C5.2 M3:C6.2 M3:IC1.3 M3:IC1.5 M3:IC1.6 M3:IC1.8 M3:IC1.15 M3:IC1.16 M3:IC2.5 M3:R3.1 P1:R1.1 P1:X1.P1 PUI1:X3.P$4 PUI1:X4.1 PUI1:X4.3 SENSOREN1:C1.2 SENSOREN1:C2.2 SENSOREN1:C3.2 SENSOREN1:C4.2 SENSOREN1:C5.2 SENSOREN1:C6.2 SENSOREN1:C7.2 SENSOREN1:C8.2 SENSOREN1:IC1.1 SENSOREN1:IC2.6 SENSOREN1:IC3.- SENSOREN1:IC4.5 SENSOREN1:IC5.5 SENSOREN1:IC6.5 SENSOREN1:IC7.5 SENSOREN1:IC8.5 SENSOREN1:J1.1 SENSOREN1:T1.C SENSOREN1:X2.1
HEARTBEAT: ARDUINO1:IC1.3 EIN/AUSGABE1:LED1.C EIN/AUSGABE1:R2.2
I-M0: ARDUINO1:IC1.36 M0:I.TP M0:IC2.7
I-M1: ARDUINO1:IC1.37 M1:I.TP M1:IC2.7
I-M2: M2:I.TP M2:IC2.7
I-M3: ARDUINO1:IC1.38 ARDUINO1:IC1.39 M3:I.TP M3:IC2.7
INTERRUPT: ANSCHLUESSE-UNTEN1:X2.18 ARDUINO1:IC1.2 ARDUINO1:R4.1
IR-EN1: ARDUINO1:IC1.41 IR_SENDER1:IC1.5 IR_SENDER1:R1.1
IR-EN2: ARDUINO1:IC1.42 IR_SENDER1:IC1.6 IR_SENDER1:R2.1
IR-SIG1: ARDUINO1:IC1.A0 IR-EMPFAENGER1:IC1.3
IR-SIG2: ARDUINO1:IC1.A1 IR-EMPFAENGER1:IC2.3
IR-SIG3: ARDUINO1:IC1.A2 IR-EMPFAENGER1:IC3.3
IR-SIG4: ARDUINO1:IC1.A3 IR-EMPFAENGER1:IC4.3
IR-SIG5: ARDUINO1:IC1.A4 IR-EMPFAENGER1:IC5.3
IR-SIG6: ARDUINO1:IC1.A5 IR-EMPFAENGER1:IC6.3
IR_SENDER1:N$1: IR_SENDER1:R3.2 IR_SENDER1:R4.2 IR_SENDER1:T1.2
IR_SENDER1:N$2: IR_SENDER1:IC1.1 IR_SENDER1:R5.1
IR_SENDER1:N$3: IR_SENDER1:LED1.2 IR_SENDER1:T1.3
IR_SENDER1:N$4: IR_SENDER1:LED1.1 IR_SENDER1:LED2.2
IR_SENDER1:N$5: IR_SENDER1:LED2.1 IR_SENDER1:LED3.2
IR_SENDER1:N$6: IR_SENDER1:LED3.1 IR_SENDER1:LED4.2
IR_SENDER1:N$7: IR_SENDER1:LED4.1 IR_SENDER1:LED5.2
IR_SENDER1:N$8: IR_SENDER1:LED5.1 IR_SENDER1:LED6.2
IR_SENDER1:N$9: IR_SENDER1:LED6.1 IR_SENDER1:LED7.2
IR_SENDER1:N$10: IR_SENDER1:R5.2 IR_SENDER1:R6.2 IR_SENDER1:T2.2
IR_SENDER1:N$11: IR_SENDER1:IC1.2 IR_SENDER1:R3.1
IR_SENDER1:N$12: IR_SENDER1:LED8.2 IR_SENDER1:T2.3
IR_SENDER1:N$13: IR_SENDER1:LED8.1 IR_SENDER1:LED9.2
IR_SENDER1:N$14: IR_SENDER1:LED9.1 IR_SENDER1:LED10.2
IR_SENDER1:N$15: IR_SENDER1:LED10.1 IR_SENDER1:LED11.2
IR_SENDER1:N$16: IR_SENDER1:LED11.1 IR_SENDER1:LED12.2
IR_SENDER1:N$17: IR_SENDER1:LED12.1 IR_SENDER1:LED13.2
IR_SENDER1:N$18: IR_SENDER1:LED13.1 IR_SENDER1:LED14.2
IR_SENDER1:N$19: IR_SENDER1:LED14.1 IR_SENDER1:R8.1
IR_SENDER1:N$20: IR_SENDER1:LED7.1 IR_SENDER1:R7.1
K1:N$1: K1:R1.2 K1:R2.2 K1:T1.1
KICK: F5:F1.2 F5:R1.2
KICK+: ANSCHLUESSE-UNTEN1:X1.9 K1:C1.1 K1:D1.1
KICK-: ANSCHLUESSE-UNTEN1:X1.10 K1:D1.2 K1:T1.2
KICK-EN: ARDUINO1:IC1.8 K1:R1.1
LED1: ARDUINO1:IC1.5 EIN/AUSGABE1:R3.2
LED2: ARDUINO1:IC1.6 EIN/AUSGABE1:R5.2
LED3: ARDUINO1:IC1.7 EIN/AUSGABE1:R4.2
M0:FILTER: M0:C5.1 M0:IC2.6
M0:M- [4A]: M0:IC1.13 M0:IC1.18 M0:IC2.3 M0:IC2.4
M0:N$4: M0:D1.2 M0:D2.1 M0:R1.2
M0:N$6: M0:C2.2 M0:D1.1 M0:IC1.12
M0:N$7: M0:C1.1 M0:R1.1
M0:N$8: M0:C1.2 M0:IC1.19
M0:N$9: M0:EN.TP M0:IC1.11 M0:IC1.20 M0:R2.2
M1:FILTER: M1:C5.1 M1:IC2.6
M1:M- [4A]: M1:IC1.13 M1:IC1.18 M1:IC2.3 M1:IC2.4
M1:N$4: M1:D1.2 M1:D2.1 M1:R1.2
M1:N$6: M1:C2.2 M1:D1.1 M1:IC1.12
M1:N$7: M1:C1.1 M1:R1.1
M1:N$8: M1:C1.2 M1:IC1.19
M1:N$9: M1:EN.TP M1:IC1.11 M1:IC1.20 M1:R2.2
M2:FILTER: M2:C5.1 M2:IC2.6
M2:M- [4A]: M2:IC1.13 M2:IC1.18 M2:IC2.3 M2:IC2.4
M2:N$4: M2:D1.2 M2:D2.1 M2:R1.2
M2:N$6: M2:C2.2 M2:D1.1 M2:IC1.12
M2:N$7: M2:C1.1 M2:R1.1
M2:N$8: M2:C1.2 M2:IC1.19
M2:N$9: M2:EN.TP M2:IC1.11 M2:IC1.20 M2:R2.2
M3:FILTER: M3:C5.1 M3:IC2.6
M3:M- [4A]: M3:IC1.13 M3:IC1.18 M3:IC2.3 M3:IC2.4
M3:N$4: M3:D1.2 M3:D2.1 M3:R1.2
M3:N$6: M3:C2.2 M3:D1.1 M3:IC1.12
M3:N$7: M3:C1.1 M3:R1.1
M3:N$8: M3:C1.2 M3:IC1.19
M3:N$9: M3:EN.TP M3:IC1.11 M3:IC1.20 M3:R2.2
M-DIR-A0: ARDUINO1:IC1.28 M0:IC1.1 M0:IC1.9 M0:IN1.TP
M-DIR-A1: ARDUINO1:IC1.30 M1:IC1.1 M1:IC1.9 M1:IN1.TP
M-DIR-A2: ARDUINO1:IC1.32 M2:IC1.1 M2:IC1.9 M2:IN1.TP
M-DIR-A3: ARDUINO1:IC1.34 M3:IC1.1 M3:IC1.9 M3:IN1.TP
M-DIR-B0: ARDUINO1:IC1.29 M0:IC1.2 M0:IC1.10 M0:IN2.TP
M-DIR-B1: ARDUINO1:IC1.31 M1:IC1.2 M1:IC1.10 M1:IN2.TP
M-DIR-B2: ARDUINO1:IC1.33 M2:IC1.2 M2:IC1.10 M2:IN2.TP
M-DIR-B3: ARDUINO1:IC1.35 M3:IC1.2 M3:IC1.10 M3:IN2.TP
M-EN0: ARDUINO1:IC1.10 M0:R2.1 M0:R3.2
M-EN1: ARDUINO1:IC1.11 M1:R2.1 M1:R3.2
M-EN2: ARDUINO1:IC1.12 M2:R2.1 M2:R3.2
M-EN3: ARDUINO1:IC1.13 M3:R2.1 M3:R3.2
MA0: ANSCHLUESSE-UNTEN1:X1.1 M0:-.TP M0:IC2.1 M0:IC2.2
MA1: ANSCHLUESSE-UNTEN1:X1.3 M1:-.TP M1:IC2.1 M1:IC2.2
MA2: ANSCHLUESSE-UNTEN1:X1.5 M2:-.TP M2:IC2.1 M2:IC2.2
MA3: ANSCHLUESSE-UNTEN1:X1.7 ANSCHLUESSE-UNTEN1:X1.8 M3:-.TP M3:IC2.1 M3:IC2.2
MB0: ANSCHLUESSE-UNTEN1:X1.2 M0:+.TP M0:IC1.4 M0:IC1.7
MB1: ANSCHLUESSE-UNTEN1:X1.4 M1:+.TP M1:IC1.4 M1:IC1.7
MB2: ANSCHLUESSE-UNTEN1:X1.6 M2:+.TP M2:IC1.4 M2:IC1.7
MB3: M3:+.TP M3:IC1.4 M3:IC1.7
MISO: ARDUINO1:IC1.50 CAMERA1:X1.1
MOSI: ARDUINO1:IC1.51 CAMERA1:X1.4
MOTOR-12V: F1:F1.2 F1:R1.2 M0:C2.1 M0:C3.1 M0:C4.1 M0:D2.2 M0:IC1.14 M0:IC1.17 M0:VS.TP M1:C2.1 M1:C3.1 M1:C4.1 M1:D2.2 M1:IC1.14 M1:IC1.17 M1:VS.TP M2:C2.1 M2:C3.1 M2:C4.1 M2:D2.2 M2:IC1.14 M2:IC1.17 M2:VS.TP M3:C2.1 M3:C3.1 M3:C4.1 M3:D2.2 M3:IC1.14 M3:IC1.17 M3:VS.TP
N$38: ARDUINO1:IC1.VIN F2:F1.2 F2:R1.2
P1:+12V: P1:T1.2
P1:N$1: P1:S1.1 P1:X1.P2
P1:N$2: P1:S1.2 P1:T1.3
P1:N$4: P1:R1.2 P1:T1.1
PHOTO: ARDUINO1:IC1.A7 SENSOREN1:R1.1 SENSOREN1:T1.A
RESET: ARDUINO1:IC1.RESET ARDUINO1:R3.1 PUI1:X4.4
RGBLED: ANSCHLUESSE-UNTEN1:X2.21 ARDUINO1:IC1.9
RST-NANO: ANSCHLUESSE-UNTEN1:X2.29 ARDUINO1:IC1.40
RX-B: ARDUINO1:IC1.17 BLUETOOTH1:IC1.3
RX-C: ARDUINO1:IC1.15 CAMERA1:X2.3
RX-P: ARDUINO1:IC1.19 PUI1:X3.P$3
SCL: ANSCHLUESSE1:X5.1 ANSCHLUESSE-UNTEN1:IC1.7 ARDUINO1:IC1.21 ARDUINO1:R2.1 ENC1:IC1.19 PUI1:X4.5 SENSOREN1:IC2.3 SENSOREN1:IC3.C SENSOREN1:IC4.3 SENSOREN1:IC5.3 SENSOREN1:IC6.3 SENSOREN1:IC7.3 SENSOREN1:IC8.3
SDA: ANSCHLUESSE1:X5.3 ANSCHLUESSE-UNTEN1:IC1.1 ARDUINO1:IC1.20 ARDUINO1:R1.1 ENC1:IC1.18 PUI1:X4.2 SENSOREN1:IC2.2 SENSOREN1:IC3.D SENSOREN1:IC4.2 SENSOREN1:IC5.2 SENSOREN1:IC6.2 SENSOREN1:IC7.2 SENSOREN1:IC8.2
SENSOREN1:N$1: SENSOREN1:IC2.4 SENSOREN1:J1.2
SENSOREN1:N$2: SENSOREN1:R2.1 SENSOREN1:X2.2
SENSOREN1:N$3: SENSOREN1:X1.1
SPEAKER: ARDUINO1:IC1.4 EIN/AUSGABE1:M1.1
STATE-B: ARDUINO1:IC1.23 BLUETOOTH1:IC1.1
SWITCH: ARDUINO1:IC1.49 EIN/AUSGABE1:S1.2
TEMP: ARDUINO1:IC1.A8 SENSOREN1:IC1.2
TX-B: ARDUINO1:IC1.16 BLUETOOTH1:IC1.2
TX-C: ARDUINO1:IC1.14 CAMERA1:X2.4
TX-P: ARDUINO1:IC1.18 PUI1:X3.P$2

## Tracks (layer width: path | path; a pad name or v marks a point on that pad's centre or on a via)
5V-CAMERA  (4 unrouted)
5V-PUI  (2 unrouted)
12V-PUI  (4 unrouted)
+5V  (53 unrouted)
+12V  (5 unrouted)
A1  (1 unrouted)
ANSCHLUESSE-UNTEN1:SCL-12V  (3 unrouted)
ANSCHLUESSE-UNTEN1:SDA-12V  (3 unrouted)
ANSCHLUSS-12V  (7 unrouted)
ARDUINO1:+5V  (6 unrouted)
ARDUINO1:N$1  (1 unrouted)
ARDUINO1:N$2  (1 unrouted)
BR-I  (1 unrouted)
BR-LED  (1 unrouted)
CAMERA1:5V-CAMERA  (1 unrouted)
CLK  (1 unrouted)
CS  (1 unrouted)
D1  (1 unrouted)
EIN/AUSGABE1:N$1  (1 unrouted)
EIN/AUSGABE1:N$2  (1 unrouted)
EIN/AUSGABE1:N$3  (1 unrouted)
EIN/AUSGABE1:N$4  (1 unrouted)
EIN/AUSGABE1:N$5  (1 unrouted)
EN-B  (1 unrouted)
ENA0  (1 unrouted)
ENA1  (1 unrouted)
ENA2  (1 unrouted)
ENA3  (1 unrouted)
ENB0  (1 unrouted)
ENB1  (1 unrouted)
ENB2  (1 unrouted)
ENB3  (1 unrouted)
ENC1:LED1  (1 unrouted)
ENC1:LED2  (1 unrouted)
ENC1:LED3  (1 unrouted)
ENC1:LED4  (1 unrouted)
ENC1:N$3  (1 unrouted)
ENC1:N$4  (1 unrouted)
ENC1:N$5  (1 unrouted)
ENC1:N$8  (1 unrouted)
ETC-12V  (12 unrouted)
F1:N$1  (1 unrouted)
F1:N$165  (1 unrouted)
F2:N$1  (1 unrouted)
F2:N$165  (1 unrouted)
F3:N$1  (1 unrouted)
F3:N$165  (1 unrouted)
F4:N$1  (1 unrouted)
F4:N$165  (1 unrouted)
F5:N$1  (1 unrouted)
F5:N$165  (1 unrouted)
F6:N$1  (1 unrouted)
F6:N$165  (1 unrouted)
GND  (150 unrouted)
HEARTBEAT  (2 unrouted)
I-M0  (2 unrouted)
I-M1  (2 unrouted)
I-M2  (1 unrouted)
I-M3  (3 unrouted)
INTERRUPT  (2 unrouted)
IR-EN1  (2 unrouted)
IR-EN2  (2 unrouted)
IR-SIG1  (1 unrouted)
IR-SIG2  (1 unrouted)
IR-SIG3  (1 unrouted)
IR-SIG4  (1 unrouted)
IR-SIG5  (1 unrouted)
IR-SIG6  (1 unrouted)
IR_SENDER1:N$1  (2 unrouted)
IR_SENDER1:N$2  (1 unrouted)
IR_SENDER1:N$3  (1 unrouted)
IR_SENDER1:N$4  (1 unrouted)
IR_SENDER1:N$5  (1 unrouted)
IR_SENDER1:N$6  (1 unrouted)
IR_SENDER1:N$7  (1 unrouted)
IR_SENDER1:N$8  (1 unrouted)
IR_SENDER1:N$9  (1 unrouted)
IR_SENDER1:N$10  (2 unrouted)
IR_SENDER1:N$11  (1 unrouted)
IR_SENDER1:N$12  (1 unrouted)
IR_SENDER1:N$13  (1 unrouted)
IR_SENDER1:N$14  (1 unrouted)
IR_SENDER1:N$15  (1 unrouted)
IR_SENDER1:N$16  (1 unrouted)
IR_SENDER1:N$17  (1 unrouted)
IR_SENDER1:N$18  (1 unrouted)
IR_SENDER1:N$19  (1 unrouted)
IR_SENDER1:N$20  (1 unrouted)
K1:N$1  (2 unrouted)
KICK  (1 unrouted)
KICK+  (2 unrouted)
KICK-  (2 unrouted)
KICK-EN  (1 unrouted)
LED1  (1 unrouted)
LED2  (1 unrouted)
LED3  (1 unrouted)
M0:FILTER  (1 unrouted)
M0:M-  (3 unrouted)
M0:N$4  (2 unrouted)
M0:N$6  (2 unrouted)
M0:N$7  (1 unrouted)
M0:N$8  (1 unrouted)
M0:N$9  (3 unrouted)
M1:FILTER  (1 unrouted)
M1:M-  (3 unrouted)
M1:N$4  (2 unrouted)
M1:N$6  (2 unrouted)
M1:N$7  (1 unrouted)
M1:N$8  (1 unrouted)
M1:N$9  (3 unrouted)
M2:FILTER  (1 unrouted)
M2:M-  (3 unrouted)
M2:N$4  (2 unrouted)
M2:N$6  (2 unrouted)
M2:N$7  (1 unrouted)
M2:N$8  (1 unrouted)
M2:N$9  (3 unrouted)
M3:FILTER  (1 unrouted)
M3:M-  (3 unrouted)
M3:N$4  (2 unrouted)
M3:N$6  (2 unrouted)
M3:N$7  (1 unrouted)
M3:N$8  (1 unrouted)
M3:N$9  (3 unrouted)
M-DIR-A0  (3 unrouted)
M-DIR-A1  (3 unrouted)
M-DIR-A2  (3 unrouted)
M-DIR-A3  (3 unrouted)
M-DIR-B0  (3 unrouted)
M-DIR-B1  (3 unrouted)
M-DIR-B2  (3 unrouted)
M-DIR-B3  (3 unrouted)
M-EN0  (2 unrouted)
M-EN1  (2 unrouted)
M-EN2  (2 unrouted)
M-EN3  (2 unrouted)
MA0  (3 unrouted)
MA1  (3 unrouted)
MA2  (3 unrouted)
MA3  (4 unrouted)
MB0  (3 unrouted)
MB1  (3 unrouted)
MB2  (3 unrouted)
MB3  (2 unrouted)
MISO  (1 unrouted)
MOSI  (1 unrouted)
MOTOR-12V  (29 unrouted)
N$38  (2 unrouted)
P1:N$1  (1 unrouted)
P1:N$2  (1 unrouted)
P1:N$4  (1 unrouted)
PHOTO  (2 unrouted)
RESET  (2 unrouted)
RGBLED  (1 unrouted)
RST-NANO  (1 unrouted)
RX-B  (1 unrouted)
RX-C  (1 unrouted)
RX-P  (1 unrouted)
SCL  (12 unrouted)
SDA  (12 unrouted)
SENSOREN1:N$1  (1 unrouted)
SENSOREN1:N$2  (1 unrouted)
SPEAKER  (1 unrouted)
STATE-B  (1 unrouted)
SWITCH  (1 unrouted)
TEMP  (1 unrouted)
TX-B  (1 unrouted)
TX-C  (1 unrouted)
TX-P  (1 unrouted)